# Altium PCB H05R2x.PcbDoc (part 2 of 2)
Units mil, origin at the board's own origin, x right, y up, seen from the top; angles counter-clockwise.
Board outline 2362.2 x 1363.78 mil, 4 copper layers (Top Layer, Layer 1, Layer 2, Bottom Layer); 78 components, 39 nets, 191 pads, 39 vias.
Unrouted connection lines stored in the file: 1.
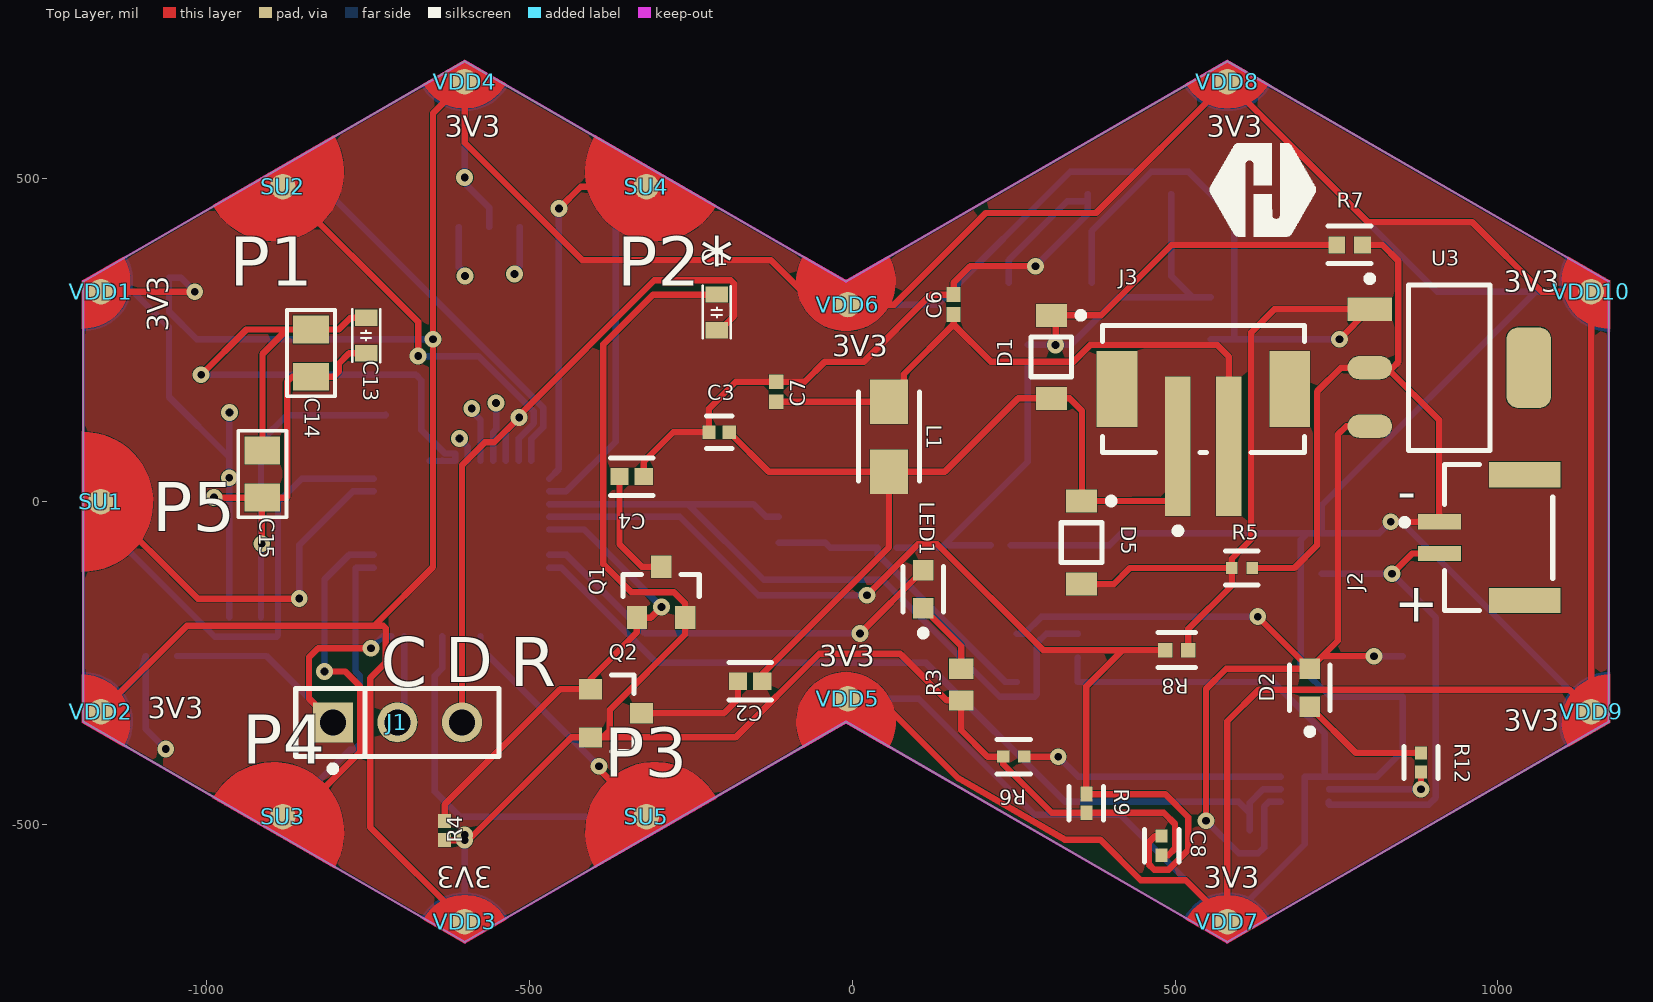
[diagram p0: Top Layer view]

## Part data (continued)
R3: library part "generic Resistor", "Res Thick Film 0603 270 Ohm 5% 0.1W(1/10W) ±200ppm/C Pad SMD Automotive T/R", Case Code (Imperial)=0603, Manufacturer=Panasonic, Manufacturer Part Number=ERJ-3GEYJ271V, Max Operating Temperature=155°C, Max Power Dissipation=100mW, Min Operating Temperature=-55°C, Temperature Coefficient=200ppm/°C, Tolerance=5%, Voltage Rating=75V, Case/Package=0603, Category="Chip SMD Resistors", ComponentLink1Description=https://datasheet.octopart.com:443/ERJ-3GEYJ271V-Panasonic-datasheet-13266872.pdf?src-supplier=RS+(Formerly+Allied+Electronics), ComponentLink1URL=https://datasheet.octopart.com:443/ERJ-3GEYJ271V-Panasonic-datasheet-13266872.pdf?src-supplier=RS+(Formerly+Allied+Electronics), ComponentLink2Description=https://datasheet.octopart.com:443/ERJ-3GEYJ271V-Panasonic-datasheet-5314550.pdf?src-supplier=Future+Electronics, ComponentLink2URL=https://datasheet.octopart.com:443/ERJ-3GEYJ271V-Panasonic-datasheet-5314550.pdf?src-supplier=Future+Electronics, ComponentLink3Description=https://datasheet.octopart.com:443/ERJ-3GEYJ271V-Panasonic-datasheet-61114972.pdf?src-supplier=Panasonic+SCT, ComponentLink3URL=https://datasheet.octopart.com:443/ERJ-3GEYJ271V-Panasonic-datasheet-61114972.pdf?src-supplier=Panasonic+SCT, ComponentLink4Description=https://datasheet.octopart.com:443/ERJ-3GEYJ271V-Panasonic-datasheet-147443676.pdf?src-supplier=Master+Electronics, ComponentLink4URL=https://datasheet.octopart.com:443/ERJ-3GEYJ271V-Panasonic-datasheet-147443676.pdf?src-supplier=Master+Electronics, ComponentLink5Description=https://datasheet.octopart.com:443/ERJ-3GEYJ271V-Panasonic-datasheet-10554283.pdf?src-supplier=element14+APAC, ComponentLink5URL=https://datasheet.octopart.com:443/ERJ-3GEYJ271V-Panasonic-datasheet-10554283.pdf?src-supplier=element14+APAC, ComponentLink6Description=https://datasheet.octopart.com:443/ERJ3GEYJ271V-Panasonic-datasheet-165581512.pdf?src-supplier=TME, ComponentLink6URL=https://datasheet.octopart.com:443/ERJ3GEYJ271V-Panasonic-datasheet-165581512.pdf?src-supplier=TME, ComponentLink7Description=https://datasheet.octopart.com:443/ERJ-3GEYJ271V-Panasonic-datasheet-164353788.pdf?src-supplier=Newark, ComponentLink7URL=https://datasheet.octopart.com:443/ERJ-3GEYJ271V-Panasonic-datasheet-164353788.pdf?src-supplier=Newark, ComponentLink8Description=https://datasheet.octopart.com:443/ERJ3GEYJ271V-Panasonic-datasheet-136608608.pdf?src-supplier=Farnell, ComponentLink8URL=https://datasheet.octopart.com:443/ERJ3GEYJ271V-Panasonic-datasheet-136608608.pdf?src-supplier=Farnell, ComponentLink9Description=https://datasheet.octopart.com:443/ERJ-3GEYJ271V-Panasonic---ECG-datasheet-15994758.pdf?src-supplier=Farnell, ComponentLink9URL=https://datasheet.octopart.com:443/ERJ-3GEYJ271V-Panasonic---ECG-datasheet-15994758.pdf?src-supplier=Farnell, ComponentLink10Description=https://datasheet.octopart.com:443/ERJ-3GEYJ271V-Panasonic-datasheet-5313456.pdf?src-supplier=Farnell, ComponentLink10URL=https://datasheet.octopart.com:443/ERJ-3GEYJ271V-Panasonic-datasheet-5313456.pdf?src-supplier=Farnell, ComponentLink11Description=https://datasheet.octopart.com/ERJ-3GEYJ271V-Panasonic-datasheet-78375410.pdf, ComponentLink11URL=https://datasheet.octopart.com/ERJ-3GEYJ271V-Panasonic-datasheet-78375410.pdf, ComponentLink12Description=https://datasheet.octopart.com/Thick-Film-Chip-Resistors-Panasonic-datasheet-family-105.pdf, ComponentLink12URL=https://datasheet.octopart.com/Thick-Film-Chip-Resistors-Panasonic-datasheet-family-105.pdf, ComponentLink13Description=https://datasheet.octopart.com:443/ERJ-3GEYJ271V-Panasonic-datasheet-7538305.pdf?src-supplier=Jameco, ComponentLink13URL=https://datasheet.octopart.com:443/ERJ-3GEYJ271V-Panasonic-datasheet-7538305.pdf?src-supplier=Jameco, ComponentLink14Description=https://datasheet.octopart.com:443/ERJ-3GEYJ271V-Panasonic-datasheet-118655.pdf?src-supplier=DigiKey, ComponentLink14URL=https://datasheet.octopart.com:443/ERJ-3GEYJ271V-Panasonic-datasheet-118655.pdf?src-supplier=DigiKey, ComponentLink15Description=https://datasheet.octopart.com:443/ERJ3GEYJ271V-Panasonic-datasheet-27908757.pdf?src-supplier=Electro+Sonic, ComponentLink15URL=https://datasheet.octopart.com:443/ERJ3GEYJ271V-Panasonic-datasheet-27908757.pdf?src-supplier=Electro+Sonic, ComponentLink16Description=https://datasheet.octopart.com:443/ERJ-3GEYJ271V-Panasonic-datasheet-37173568.pdf?src-supplier=Electro+Sonic, ComponentLink16URL=https://datasheet.octopart.com:443/ERJ-3GEYJ271V-Panasonic-datasheet-37173568.pdf?src-supplier=Electro+Sonic, Composition="Thick Film", Contact Plating=Tin, Depth=800µm, Features="Automotive AEC-Q200", Height=450µm, Lead Free="Lead Free", Length=1.6mm, Library=Hexabitz, Lifecycle Status=Production, Military Standard=Not, Mounting Technology="Surface Mount", Number of Terminals=2, Number of Terminations=2, Packaging="Cut Tape", Power Dissipation=100mW, Power Rating=100mW, Pricing="5000=0.00355, 10000=0.00348, 20000=0.00342, 30000=0.00335, 40000=0.00329 (USD)", Radiation Hardening=No, REACH SVHC=Yes, RoHS=Compliant, Schedule B="8533210045, 8533210045|8533210045|8533210045|8533210045|8533210045|8533210045|8533210045|8533210045|8533210045|8533210045|8533210045|8533210045|8533210045|8533210045|8533210045|8533210045|8533210045|8533210045|8533210045|8533210045|8533210045|8533210045|8533210045|85", Stock=45000, Supplier=Avnet, Supplier Part Number=ERJ-3GEYJ271V, Termination=SMD/SMT, Voltage Rating (DC)=75V, Width=800µm, Working Voltage=75V
R4: library part CMP-2002-04584-1, Manufacturer="KOA Speer", Part Number=SG73P1ETTP1002F
R5: library part CMP-02407-004026-1, "RES SMD 1.2K OHM 1% 1/10W 0402", Case/Package=0402, Max Operating Temperature=125°C, Max Power Dissipation=100mW, Min Operating Temperature=-55°C, Package Quantity=10000, Resistance=820R, Temperature Coefficient=50ppm/°C, Tolerance=1%, Composition="Thin Film", Contact Plating=Tin, Depth=0.5mm, Height=0.015inch, Lead Free="Lead Free", Length=0.039inch, Military Standard=Not, Number of Terminations=2, Packaging="Tape and Reel", Radiation Hardening=No, Width=0.02inch
R6: library part CMP-04015-061446-1, "3.9kΩ ±1% 0.063W, 1/16W Chip Resistor 0402 (1005 Metric) Moisture Resistant Thin Film"
R7: library part CMP-26527-000729-1, "General Purpose Thick Film Chip Resistor, 0402, 0.1Ω, 1%, 200ppm/°C, 0.125W", Case/Package=0402, Max Operating Temperature=155°C, Max Power Dissipation=125mW, Min Operating Temperature=-55°C, Package Quantity=10000, Resistance=100mR, Resistor Type="Thick Film", Temperature Coefficient=200ppm/°C, Tolerance=1%, Contact Plating=Tin, Height=0.017inch, Length=0.039inch, Mount="Surface Mount", Number of Terminations=2, Packaging="Tape and Reel", Radiation Hardening=No, RoHS Compliant=Yes, Series=CSR, Width=0.02inch
R8 R11: library part CMP-02407-002513-1, "RES Thick Film, 11kΩ, 1%, 0.063W, 100ppm/°C, 0402", Case/Package=0402, Max Operating Temperature=155°C, Max Power Dissipation=63mW, Min Operating Temperature=-55°C, Package Quantity=50000, Resistance=11kR, Temperature Coefficient=100ppm/°C, Tolerance=1%, Composition="Thick Film", Features="Automotive AEC-Q200", Height=0.016inch, Lead Free="Lead Free", Length=0.039inch, Number of Terminations=2, Packaging="Tape and Reel", Width=0.02inch
R12: library part CMP-03412-047873-1, "RES 1kΩ ±1% 0.063W 0402", RoHS Compliant=Yes
R13: library part "generic Resistor", "100mW Thick Film Resistors ±100ppm/℃ ±1% 10kΩ 0603 Chip Resistor - Surface Mount ROHS", Case Code (Imperial)=0603, Manufacturer="Yageo Group", Manufacturer Part Number=RC0603FR-0710KL, Max Operating Temperature=155°C, Min Operating Temperature=-55°C, Power Dissipation=100mW, Supplier Part Number=4023214, Temperature Coefficient=100ppm/°C, Tolerance=1%, Voltage Rating=75V, Voltage Rating (DC)=50V, Case Code (Metric)=0603, Case/Package=0603, Category="Chip SMD Resistors", China RoHS=Non-Compliant, ComponentLink1Description=https://datasheet.octopart.com:443/RC0603FR-0710KL-Yageo-datasheet-175887523.pdf?src-supplier=IHS, ComponentLink1URL=https://datasheet.octopart.com:443/RC0603FR-0710KL-Yageo-datasheet-175887523.pdf?src-supplier=IHS, ComponentLink2Description=https://datasheet.octopart.com:443/RC0603FR-0710KL-Yageo-datasheet-103092701.pdf?src-supplier=Upverter, ComponentLink2URL=https://datasheet.octopart.com:443/RC0603FR-0710KL-Yageo-datasheet-103092701.pdf?src-supplier=Upverter, ComponentLink3Description=https://datasheet.octopart.com:443/RC0603FR-0710KL-Yageo-datasheet-98239111.pdf?src-supplier=Upverter, ComponentLink3URL=https://datasheet.octopart.com:443/RC0603FR-0710KL-Yageo-datasheet-98239111.pdf?src-supplier=Upverter, ComponentLink4Description=https://datasheet.octopart.com:443/RC0603FR-0710KL-Yageo-datasheet-141265859.pdf?src-supplier=Upverter, ComponentLink4URL=https://datasheet.octopart.com:443/RC0603FR-0710KL-Yageo-datasheet-141265859.pdf?src-supplier=Upverter, ComponentLink5Description=https://sigma.octopart.com:443/138820526/technical_drawing/Yageo-RC0603FR-0710KL.pdf?src-supplier=Upverter, ComponentLink5URL=https://sigma.octopart.com:443/138820526/technical_drawing/Yageo-RC0603FR-0710KL.pdf?src-supplier=Upverter, ComponentLink6Description=https://datasheet.octopart.com:443/RC0603FR-0710KL-Yageo-datasheet-8328172.pdf?src-supplier=Farnell, ComponentLink6URL=https://datasheet.octopart.com:443/RC0603FR-0710KL-Yageo-datasheet-8328172.pdf?src-supplier=Farnell, ComponentLink7Description=https://datasheet.octopart.com:443/RC0603FR-0710KL-Yageo-datasheet-13691069.pdf?src-supplier=Farnell, ComponentLink7URL=https://datasheet.octopart.com:443/RC0603FR-0710KL-Yageo-datasheet-13691069.pdf?src-supplier=Farnell, ComponentLink8Description=https://datasheet.octopart.com:443/RC0603FR-0710KL-Yageo-datasheet-62067350.pdf?src-supplier=element14+APAC, ComponentLink8URL=https://datasheet.octopart.com:443/RC0603FR-0710KL-Yageo-datasheet-62067350.pdf?src-supplier=element14+APAC, ComponentLink9Description=https://datasheet.octopart.com:443/RC0603FR-0710KL-Yageo-datasheet-17842380.pdf?src-supplier=element14+APAC, ComponentLink9URL=https://datasheet.octopart.com:443/RC0603FR-0710KL-Yageo-datasheet-17842380.pdf?src-supplier=element14+APAC, ComponentLink10Description=https://datasheet.octopart.com:443/RC0603FR-0710KL-Yageo-datasheet-15599030.pdf?src-supplier=Future+Electronics, ComponentLink10URL=https://datasheet.octopart.com:443/RC0603FR-0710KL-Yageo-datasheet-15599030.pdf?src-supplier=Future+Electronics, ComponentLink11Description=https://datasheet.octopart.com:443/RC0603FR-0710KL-Yageo-datasheet-164759695.pdf?src-supplier=Future+Electronics, ComponentLink11URL=https://datasheet.octopart.com:443/RC0603FR-0710KL-Yageo-datasheet-164759695.pdf?src-supplier=Future+Electronics, ComponentLink12Description=https://datasheet.octopart.com:443/RC0603FR-0710KL-Yageo-datasheet-127823281.pdf?src-supplier=Future+Electronics, ComponentLink12URL=https://datasheet.octopart.com:443/RC0603FR-0710KL-Yageo-datasheet-127823281.pdf?src-supplier=Future+Electronics, ComponentLink13Description=https://datasheet.octopart.com:443/RC0603FR-0710KL-Yageo-datasheet-137700087.pdf?src-supplier=Future+Electronics, ComponentLink13URL=https://datasheet.octopart.com:443/RC0603FR-0710KL-Yageo-datasheet-137700087.pdf?src-supplier=Future+Electronics, ComponentLink14Description=https://datasheet.octopart.com:443/RC0603FR-0710KL-Yageo-datasheet-27584510.pdf?src-supplier=Future+Electronics, ComponentLink14URL=https://datasheet.octopart.com:443/RC0603FR-0710KL-Yageo-datasheet-27584510.pdf?src-supplier=Future+Electronics, ComponentLink15Description=https://datasheet.octopart.com:443/RC0603FR-0710KL-Yageo-datasheet-8324193.pdf?src-supplier=Future+Electronics, ComponentLink15URL=https://datasheet.octopart.com:443/RC0603FR-0710KL-Yageo-datasheet-8324193.pdf?src-supplier=Future+Electronics, ComponentLink16Description=https://datasheet.octopart.com:443/RC0603FR-0710KL-Yageo-datasheet-12596169.pdf?src-supplier=Newark, ComponentLink16URL=https://datasheet.octopart.com:443/RC0603FR-0710KL-Yageo-datasheet-12596169.pdf?src-supplier=Newark, ComponentLink17Description=https://datasheet.octopart.com:443/RC0603FR-0710KL-Yageo-datasheet-503470.pdf?src-supplier=Newark, ComponentLink17URL=https://datasheet.octopart.com:443/RC0603FR-0710KL-Yageo-datasheet-503470.pdf?src-supplier=Newark, ComponentLink18Description=https://datasheet.octopart.com:443/RC0603FR-0710KL-Yageo-datasheet-34211833.pdf?src-supplier=Newark, ComponentLink18URL=https://datasheet.octopart.com:443/RC0603FR-0710KL-Yageo-datasheet-34211833.pdf?src-supplier=Newark, ComponentLink19Description=https://datasheet.octopart.com:443/RC0603FR-0710KL-Yageo-datasheet-79472498.pdf?src-supplier=Megastar, ComponentLink19URL=https://datasheet.octopart.com:443/RC0603FR-0710KL-Yageo-datasheet-79472498.pdf?src-supplier=Megastar, ComponentLink20Description=https://datasheet.octopart.com/RC0603FR-0710KL-Yageo-datasheet-73766026.pdf, ComponentLink20URL=https://datasheet.octopart.com/RC0603FR-0710KL-Yageo-datasheet-73766026.pdf, ComponentLink21Description=https://datasheet.octopart.com:443/RC0603FR-0710KL-Yageo-datasheet-118562.pdf?src-supplier=DigiKey, ComponentLink21URL=https://datasheet.octopart.com:443/RC0603FR-0710KL-Yageo-datasheet-118562.pdf?src-supplier=DigiKey, ComponentLink22Description=http://sigma.octopart.com:80/rohs_statement/Yageo-company-2.pdf?src-supplier=Compliance+Statements, ComponentLink22URL=http://sigma.octopart.com:80/rohs_statement/Yageo-company-2.pdf?src-supplier=Compliance+Statements, ComponentLink23Description=http://sigma.octopart.com:80/conflict_mineral_statement/Yageo-company-3.pdf?src-supplier=Compliance+Statements, ComponentLink23URL=http://sigma.octopart.com:80/conflict_mineral_statement/Yageo-company-3.pdf?src-supplier=Compliance+Statements, Composition="Thick Film", Depth=800µm, Height=450µm, Lead Free="Lead Free", Lead Pitch=300µm, Length=1.6mm, Library=Hexabitz, Lifecycle Status=Production, Military Standard=Not, Mounting Technology="Surface Mount", Number of Terminals=2, Packaging="Tape & Reel", Pins=2, Power Rating=100mW, Pricing="5000=0.001, 25000=0.001, 150000=0.001, 500000=0.0009, 1500000=0.0009 (USD)", REACH SVHC=Yes, RoHS=Compliant, Schedule B="8533210045, 8533210045|8533210045|8533210045|8533210045|8533210045|8533210045|8533210045|8533210045|8533210045|8533210045|8533210045|8533210045|8533210045|8533210045|8533210045|8533210045|8533210045|8533210045|8533210045|8533210045|8533210045|8533210045|8533210045|85", Stock=22990000, Supplier="Future Electronics", Termination=SMD/SMT, Weight=2.012816mg, Width=800µm, Working Voltage=75V
R14: library part "generic Resistor", Library=Hexabitz
SD1 SD2 SD3 SD4 SD5: library part HEXABIT_UART_PORT_D
SU1 SU2 SU3 SU4 SU5: library part HEXABIT_UART_PORT_U
U1: library part CMP-06318-000013-1, "IC BATT CHG LI-ION 1CELL 6TDFN", Max Operating Temperature=125°C, Max Supply Voltage=6V, Min Operating Temperature=-40°C, Min Supply Voltage=3.75V, Package Quantity=3000, Lead Free="Lead Free", Mount="Surface Mount", Number of Pins=6, Packaging="Tape and Reel", Radiation Hardening=No, RoHS Compliant=Yes
U2: library part CMP-0187-00458-3, "None", Case/Package=SOT-23, Input Bias Current=1pA, Input Offset Voltage (Vos)=4.5mV, Max Operating Temperature=125°C, Max Supply Voltage=6V, Min Operating Temperature=-40°C, Min Supply Voltage=1.8V, Nominal Supply Current=100uA, Operating Supply Voltage=5.5V, Output Current=23mA, Package Quantity=3000, Power Supply Rejection Ratio (PSRR)=86dB, Voltage Gain=112dB, Amplifier Type="GENERAL PURPOSE", Bandwidth=1MHz, Common Mode Rejection Ratio=60dB, Contact Plating=Tin, Gain Bandwidth Product=1MHz, Height=1.3mm, Input Offset Voltage-Max=4.5mV, Lead Free="Lead Free", Length=3.1mm, Mount="Surface Mount", Number of Amplifiers=1, Number of Channels=1, Number of Circuits=1, Number of Elements=1, Number of Pins=5, Operating Supply Current=100uA, Output Current per Channel=23mA, Packaging="Tape and Reel", Radiation Hardening=No, REACH SVHC="No SVHC", RoHS Compliant=Yes, Slew Rate=0.6V/µs, Slew Rate-Nom=0.6V/µs, Supply Current=100uA, Technology=CMOS, Unity Gain Bandwidth Product=1MHz, Voltage=6V, Width=1.8mm
U3: library part CMP-06324-000149-1, "IC REG LINEAR 5V 300MA SOT223-3", Case/Package=SOT-223-3, Dropout Voltage=300mV, Max Input Voltage=16V, Max Operating Temperature=125°C, Max Output Current=300mA, Min Input Voltage=3.6V, Min Operating Temperature=-40°C, Min Output Voltage=3.3V, Nominal Output Voltage=5V, Nominal Supply Current=68uA, Package Quantity=1, Power Supply Rejection Ratio (PSRR)=80dB, Quiescent Current=100uA, Accuracy=2%, Height=1.7mm, Lead Free="Lead Free", Length=6.7mm, Mount="Surface Mount", Number of Outputs=1, Number of Pins=3, Number of Regulators=1, Output Current=300mA, Output Type=Fixed, Output Voltage=5V, Packaging="Tape and Reel", Polarity=Positive, Reach SVHC Compliant=Yes, RoHS Compliant=Yes, Supply Current=68uA, Width=3.7mm
U4: "MCU 32-bit ARM Cortex M0+ RISC 512KB Flash 1.8V/2.5V/3.3V 48-Pin UFQFPN EP Tray", Manufacturer=STMicroelectronics, Supplier Part Number=497-STM32G0B1CEU6-ND, Category=Microcontrollers, Library=Hexabitz, Pricing="1=4.78, 10=3.635, 25=3.3488, 100=3.0347, 260=2.87923, 520=2.7899, 1040=2.71638, 2600=2.63877 (USD)", RoHS=Yes, Stock=4305, Supplier=Digikey, Supplier 1=Digikey, Supplier Part Number 1=497-STM32G0B1CEU6-ND
VDD1 VDD2 VDD3 VDD4 VDD7 VDD8 VDD9 VDD10: library part HEXABIT_POWER_PORT_U
VDD5: library part HEXABIT_POWER_PORT_U_300L
VDD6: library part HEXABIT_POWER_PORT_U_300R
X1: "Ceramic Resonator 8MHz ±0.5% (Tol) ±0.2% (Stability) 10pF 40Ohm 3-Pin CSMD T/R", Case Code (Imperial)=1206, Case Code (Metric)=3216, Frequency=8MHz, Frequency Stability=0.2%, Frequency Tolerance=0.5%, Load Capacitance=10pF, Manufacturer=Murata, Max Operating Temperature=125°C, Min Operating Temperature=-40°C, Package Quantity=1, Case/Package=1206, Category=Capacitors, Contact Plating=Gold, Height=0.031inch, Impedance=40R, Length=3.2mm, Library=Hexabitz, Manufacturer Part Number=CSTCE8M00G52Z-R0, Mounting Technology="Surface Mount", Packaging="Tape and Reel", Pins=3, RoHS Compliant=Yes, Self Resonant Frequency=8MHz, Series=CERALOCK®, Termination=SMD/SMT, Tolerance=0.5%, Width=1.3mm

## Via types
v1: diameter 26, hole 12, Top Layer to Bottom Layer, 39 vias

## Nets (pads, with @x,y where several pads share a name; then routed paths per layer and width w, separated by ;. In a path a pad name is that pad's centre, name@x,y a point inside that pad or via, vN(x,y) a via of type N, cw(c..) or ccw(c..) an arc to the next point about the centre after c; other vN are vias at no path point)
+5: C11.1 D2.2 R11.1 U1.4 U2.5 U3.3 | length 1642.4
  Top Layer w10: v1(548,-494) 548,-290 579.4,-258.6 D2.2 ; v1(628.22,-178) D2.2 ; U3.3 765,116.88 752,103.88 752,-215.42 728.16,-239.26 ; v1(808,-239.26) 728.16,-239.26 ; D2.2 728.16,-239.26
  Bottom Layer w10: U2.5 266.76,-204.42 293.17,-178 v1(628.22,-178) ; v1(548,-494) 598.63,-544.63 R11.1 629,-544.63 638,-535.63 638,-471.99 645,-464.99 U1.4 ; v1(808,-239.26) C11.1
CLK_BOOT: J1.1 R13.1 U4.36 | length 540.5
  Top Layer w10: J1.1 -841,-304.82 -841,-241 -827,-227 v1(-745,-227)
  Bottom Layer w10: R13.1 -906.85,-238.97 J1.1 ; v1(-745,-227) -726.42,-208.43 U4.36
DATA: J1.2 U4.35 | length 143.8
  Bottom Layer w10: J1.2 -693.55,-341.74 U4.35
GND: C1.1 C5.2 C8.2 C10.2 C11.2 D6.1 GND1.Pwr_D GND2.Pwr_D GND3.Pwr_D GND4.Pwr_D GND5.Pwr_D GND6.Pwr_D GND7.Pwr_D GND8.Pwr_D GND9.Pwr_D GND10.Pwr_D J2.1 Q1.2 Q2.2 R3.1 R4.1 R5.2 R6.2 R7.2 R9.2 R13.2 R14.1 U1.1 U1.7 U2.2 U2.3 U3.2 U4.49 X1.P$2 | length 13352.8
  Top Layer w10: R4.1 v1(-600,-524.25) -594.25,-524.25 -435.07,-365.07 Q2.2 -386.07,-365.07 ; C1.1 -308,320.64 -385,243.64 -385,-97 -342,-140 -276,-140 -258.35,-157.65 Q1.2 -258.35,-205.36 -375,-322 -375,-354 -386.07,-365.07 ; C8.2 489.43,-547.57 500,-537 500,-499 482.57,-481.58 R9.2 309,-481.58 233.85,-406.43 R6.2 209.81,-394.87 168.94,-354 R3.1 146.77,-307.77 77.31,-238.31 74.38,-235.38 -50.87,-235.38 -180.56,-365.07 -386.07,-365.07 ; R5.2 685,-102.68 720,-67.68 720,170.43 757,207.43 U3.2 U3.2@828,207.43 ; R7.2 821,397.69 846,372.69 846,216.43 837,207.43 U3.2@828,207.43 ; v1(834,-31) J2.1@909,-31.04 ; J2.1 J2.1@909,-31.04 ; U3.2@828,207.43 909,126.43 J2.1@909,-31.04
  Layer 1 w10: v1(-964.56,37) -878.56,-49 816,-49 v1(834,-31) ; v1(-964,138) v1(-600,502)
  Layer 2 w10: v1(-1062.96,-383) -733,-383 ; v1@-964.56,41 v1(-964.56,37) -964.56,-74.45 -762,-277 -762,-354 -733,-383 ; v1(-600,-516) -733,-383
  Bottom Layer w10: GND1.Pwr_D -1101.03,-262.97 R13.2 -1093.96,-352 v1(-1062.96,-383) ; GND2.Pwr_D -1112.97,325.2 -1057.77,270 D6.1 -1057.77,162 -964.56,68.78 ; R14.1 -964.56,68.78 ; v1(-964,138) -964.56,137.44 -964.56,68.78 ; GND3.Pwr_D v1(-600,-524.25) v1(-600,-516) ; GND4.Pwr_D v1(-600,502) -596.94,498.93 -596.94,490.21 -561.6,454.87 X1.P$2 ; GND5.Pwr_D 103.2,-305.2 283,-485 415.71,-485 GND7.Pwr_D 701.06,-530.43 U1.7 701.06,-425.62 U1.1@732,-425.62 ; GND6.Pwr_D 132.2,305.2 338,511 441.71,511 GND8.Pwr_D 906.29,325.2 1058.2,325.2 ; C5.2 398.75,-67.25 417.36,-48.65 705.36,-48.65 ; U2.2 349,-241.82 349,-279.22 U2.3 652.21,-279.22 732,-359 U1.1@732,-425.62 ; GND9.Pwr_D 850.29,-31 v1(834,-31) 816,-49 727.69,-49 C10.2 ; GND10.Pwr_D 1058.2,325.2 ; 705.36,-48.65 695,-59 695,-257 740.29,-302.29 C11.2 852.59,-386 812.97,-425.62 U1.1 U1.1@732,-425.62 ; 705.36,-48.65 C10.2 ; C10.2 727.33,-5.67 1058.2,325.2
  other v1: 834,-31 834,-31 -964.56,37
ISNS: C9.2 D1.1 D3.1 R7.1 R10.2 | length 1020.6
  Top Layer w10: D1.1 D1.1@315,288.56 ; v1(315,242.67) D1.1@315,288.56 ; R7.1 495.14,397.69 386,288.56 D1.1@315,288.56
  Bottom Layer w10: R10.2 v1(315,242.67) 338.68,242.67 412.71,316.71 527.23,316.71 ; D3.1 493.94,350 527.23,316.71 ; C9.2 527.23,316.71
NetC2_1: C2.1 C3.2 D1.2 D5.1 J3.1 L1.2 | length 1405.9
  Top Layer w10: C3.2 -129.34,46.58 L1.2 ; C2.1 -139.14,-267 57.07,-70.8 L1.2 ; D5.1 D5.1@356,1.04 ; J3.1 504.54,1 504.49,1 432.96,1.04 D5.1@356,1.04 ; L1.2 143.76,46.58 257,159.82 D1.2 337.18,159.82 356,141 D5.1@356,1.04
NetC2_2: C2.2 Q2.3 | length 186.3
  Top Layer w10: Q2.3 -198.49,-327.67 -176.82,-306 C2.2
NetC3_1: C3.1 C4.1 C6.2 C7.2 D3.2 D4.1 | length 1128.3
  Top Layer w10: C4.1 -322.51,62 -277.08,107.42 C3.1 -221.67,143.91 -180,185.58 C7.2 -73.44,185.58 -42.67,216.35 17.7,216.35 122,320.65 C6.2 157.16,339.16 182.66,364.66 v1(283.86,364.66)
  Bottom Layer w10: D4.1 242.35,374.14 333.2,465 D3.2@365.2,465 ; v1(283.86,364.66) 365.2,446 D3.2@365.2,465 ; D3.2 D3.2@365.2,465
NetC4_2: C4.2 Q1.3 | length 183.6
  Top Layer w10: C4.2 -360.19,-66 -325.43,-100.76 Q1.3
NetC5_1: C5.1 R2.2 R10.1 | length 482.2
  Bottom Layer w10: R2.2 138.89,-71.18 142.81,-67.25 ; C5.1 142.81,-67.25 ; R10.1 272.06,62 142.81,-67.25
NetC6_1: C6.1 C7.1 J3.2 L1.1 | length 958.4
  Top Layer w10: C7.1 -66,154.87 -65.87,155 L1.1@57.07,155 ; L1.1 L1.1@57.07,155 ; C6.1 157.16,274.41 ; J3.2 583.29,224.71 565,243 369,243 343,217 214.57,217 157.16,274.41 ; L1.1@57.07,155 79.93,177.86 79.93,197.17 157.16,274.41
NetC8_1: C8.1 R8.2 R9.1 U4.16 | length 1710.9
  Top Layer w10: v1(23,-145) 102,-66 132,-66 295.8,-229.8 419,-229.8 ; C8.1 469,-517.76 459,-527.76 459,-561 468,-570 490,-570 520.65,-539.35 520.65,-488.45 485,-452.8 R9.1 362.7,-286.1 419,-229.8 ; R8.2 419,-229.8
  Bottom Layer w10: U4.16 -267,-23.39 -145.38,-145 v1(23,-145)
NetC10_1: C10.1 J2.2 U1.3 | length 744.3
  Top Layer w10: v1(836.16,-111.69) 867.59,-80.26 J2.2
  Bottom Layer w10: C10.1 v1(836.16,-111.69) 904,-179.52 904,-458 893,-469 739,-469 738,-468 738,-464.99 U1.3
NetD2_1: D2.1 R12.1 | length 201.7
  Top Layer w10: D2.1 780.18,-389.03 R12.1
NetLED1_1: LED1.1 R3.2 | length 117.9
  Top Layer w10: LED1.1 168.94,-223.84 R3.2
NetLED1_2: LED1.2 U4.19 | length 670.2
  Top Layer w10: v1(12.16,-204) LED1.2
  Bottom Layer w10: U4.19 -442.18,-82.44 -320.61,-204 v1(12.16,-204)
NetQ1_1: Q1.1 Q2.1 R4.2 U4.17 | length 735.1
  Top Layer w10: R4.2 -631,-469 -452.27,-290.27 Q2.1 -404.92,-274 -333.16,-202.24 Q1.1 -311.5,-179.5 v1(-295,-163)
  Bottom Layer w10: U4.17 -414.93,-43.07 v1(-295,-163)
NetR1_1: R1.1 U2.1 U4.15 | length 1178.4
  Bottom Layer w10: U4.15 -254.3,-3.7 ; R1.1 -133,-23.68 -152.97,-3.7 -254.3,-3.7 ; U2.1 300.59,-204.42 286,-219 286,-298.52 282.51,-302 228.49,-302 47.49,-121 -137,-121 -254.3,-3.7
NetR1_2: R1.2 R2.1 U2.4 | length 464.7
  Bottom Layer w10: R1.2 -41.68,-63.33 -33.83,-71.18 R2.1 40.06,-81.87 237.41,-279.22 U2.4
NetR6_1: R6.1 U1.6 | length 409.9
  Top Layer w10: R6.1 v1(319.32,-394.87)
  Bottom Layer w10: v1(319.32,-394.87) 350.07,-425.62 U1.6
NetR11_2: R11.2 U1.5 U4.20 | length 1341.7
  Bottom Layer w10: U4.20 -450,-102.13 -302.37,-249.76 114.58,-249.76 329.83,-465 598.65,-465 615.65,-482 ; R11.2 615.65,-482 ; U1.5 636.35,-445.31 615.65,-466 615.65,-482
NetR12_2: R12.2 U1.2 | length 168.9
  Top Layer w10: v1(880.91,-445.31) R12.2
  Bottom Layer w10: U1.2 v1(880.91,-445.31)
NetU4_8: U4.8 X1.P$3 | length 376
  Layer 2 w10: v1(-599.44,349.62) -599.44,159.4 -588.82,148.78 v1(-588.82,144.45)
  Bottom Layer w10: X1.P$3 -608.84,363.34 -599.44,353.95 v1(-599.44,349.62) ; v1(-588.82,144.45) -588.82,140.12 -575.44,126.74 U4.8
NetU4_9: U4.9 X1.P$1 | length 380.2
  Layer 2 w10: v1(-551.36,152.83) -552.48,153.95 -552.48,216.92 -522.85,246.55 v1(-522.85,352.41)
  Bottom Layer w10: U4.9 -555.75,107.55 -551.36,111.94 v1(-551.36,152.83) ; v1(-522.85,352.41) -522.85,356.74 -514.36,365.24 X1.P$1
NRST: C1.2 J1.3 U4.10 | length 1103.9
  Top Layer w10: J1.3 -604.08,56.38 -568.57,91.89 -554.16,91.89 v1(-515.59,130.47) -515.59,133.56 -306.41,342.74 -188.06,342.74 -182.5,337.17 -182.5,287.62 -204.6,265.52 C1.2
  Bottom Layer w10: U4.10 -536.07,109.99 v1(-515.59,130.47)
UART1_RX: SD5.UART_D U4.32 | length 588.9
  Bottom Layer w10: U4.32 -634.49,-258 -646,-269.51 -646,-449 -607.2,-487.8 SD5.UART_D
UART1_TX: SU5.UART_U U4.29 | length 385.8
  Top Layer w10: v1(-391.8,-409.65) -391.8,-414.5 SU5.UART_U
  Bottom Layer w10: U4.29 -575.44,-226 v1(-391.8,-409.65)
UART2_RX: SD4.UART_D U4.14 | length 549.5
  Bottom Layer w10: U4.14 -443,15.98 -366,92.98 -366,440.3 SD4.UART_D
UART2_TX: SU4.UART_U U4.13 | length 574.2
  Top Layer w10: v1(-454,454) -420.2,487.8 SU4.UART_U
  Bottom Layer w10: U4.13 -469,35.67 -454,50.67 v1(-454,454)
UART3_RX: SD1.UART_D U4.48 | length 750.3
  Bottom Layer w10: SD1.UART_D -1163.39,-32.61 -987,-209 -891,-209 -889,-207 -889,-1 -852.33,35.67 U4.48
UART3_TX: SU1.UART_U U4.47 | length 602.1
  Top Layer w10: SU1.UART_U -1013.39,-150 v1(-856,-150)
  Bottom Layer w10: v1(-856,-150) -856,-67 -773.01,15.98 U4.47
UART4_RX: SD2.UART_D U4.12 | length 634.6
  Bottom Layer w10: SD2.UART_D -820.59,487.8 -478.59,145.8 -478.59,115.15 -496.7,97.03 U4.12
UART4_TX: SU2.UART_U U4.11 | length 649.7
  Top Layer w10: SU2.UART_U -672,278.3 v1(-672,225.5)
  Bottom Layer w10: v1(-672,225.5) -578.79,225.5 -493.09,139.79 -493.09,121.15 -516.38,97.86 U4.11
UART5_RX: SD3.UART_D U4.41 | length 469.6
  Bottom Layer w10: SD3.UART_D -777.7,-384 -771,-384 -762,-375 -762,-270 -769,-263 -769,-103.13 -768,-102.13 U4.41
UART5_TX: SU3.UART_U U4.42 | length 561.9
  Top Layer w10: SU3.UART_U -861.8,-487.8 -762,-388 -762,-286 -785,-263 v1(-817,-263)
  Bottom Layer w10: v1(-817,-263) -817,-120.44 -779,-82.44 U4.42
VDD: D6.2 FB1.1 VDD1.Pwr_U VDD2.Pwr_U VDD3.Pwr_U VDD4.Pwr_U VDD5.Pwr_U VDD6.Pwr_U VDD7.Pwr_U VDD8.Pwr_U VDD9.Pwr_U VDD10.Pwr_U | length 7092.2
  Top Layer w10: VDD2.Pwr_U -1030.06,-192 -740,-192 ; VDD1.Pwr_U v1(-1018,325.2) ; VDD3.Pwr_U -746,-504.39 -746,-273.1 -722,-249.1 -722,-196.06 -726.05,-192 -740,-192 ; VDD5.Pwr_U 41.2,-305.2 162.67,-426.68 163.6,-427.61 329.12,-523.17 384.16,-523.17 447,-586 516.71,-586 VDD7.Pwr_U 581.1,-339.9 630,-291 1110.29,-291 VDD9.Pwr_U VDD10.Pwr_U 1067.8,325.2 960,433 798.49,433 VDD8.Pwr_U 377.71,447 207,447 65.2,305.2 VDD6.Pwr_U -57.2,305.2 -126.09,374.08 -418.09,374.08 -600,556 VDD4.Pwr_U -649,601.39 v1(-649,251.6) -649,-101 -740,-192
  Bottom Layer w10: v1(-1018,325.2) -1039.76,346.96 -1057.77,346.96 D6.2 -1057.77,294.37 -1015,251.6 FB1.1 v1(-649,251.6)
VDDA: C12.2 C13.2 C14.1 C15.2 FB1.2 U4.4 U4.5 U4.6 | length 1035.4
  Top Layer w10: v1(-1008,196.48) -937.89,266.59 -875,266.59 ; C15.2 -913,79.3 -913,228.59 -875,266.59 ; C13.2 -776.72,284.87 -795,266.59 C14.1 -875,266.59
  Bottom Layer w10: v1(-1008,196.48) FB1.2 -675.46,196.48 -666.98,188 C12.2 -666.98,111 -630.55,74.57 -614.81,74.57 U4.6 -614.81,63 U4.5@-634.49,63 ; U4.4 -654.18,63 U4.5@-634.49,63 ; U4.5 U4.5@-634.49,63
VREC: C9.1 D4.2 D5.2 R5.1 R8.1 U3.1 | length 1795.1
  Top Layer w10: D5.2 405,-127.7 430.02,-102.68 R5.1 ; R8.1 520.69,-197.11 587.8,-130 R5.1 ; v1(754.59,251.57) U3.1@801,297.99 ; U3.1 U3.1@801,297.99 ; R5.1 587.8,-88.2 618,-58 618,262 653.99,297.99 U3.1@801,297.99
  Bottom Layer w10: D4.2 371.09,419.08 463,511 521,511 592,440 592,251.57 ; C9.1 592,251.57 ; v1(754.59,251.57) 592,251.57
VSSA: C12.1 C13.1 C14.2 C15.1 R14.2 U4.7 | length 1487.3
  Top Layer w10: v1(-988,6.3) C15.1@-914,6.3 ; v1(-914,-65) C15.1@-914,6.3 ; C13.1 -779,229.75 -795,213.75 -795,201.59 -803,193.59 C14.2 -867,193.59 -875,185.59 -875,7.3 -876,6.3 C15.1 C15.1@-914,6.3
  Layer 1 w10: v1(-988,6.3) -988,62 -952,98 v1(-608,98)
  Bottom Layer w10: R14.2 v1@-915.34,-66.35 ; v1(-914,-65) v1@-915.34,-66.35 ; C12.1 -722.1,134 -875.34,134 -915.34,94 v1@-915.34,-66.35 ; v1(-608,98) -595.12,85.12 U4.7
pads on no net: J2.3 J2.4 J3.3 J3.4 U3.4 U4.1 U4.2 U4.3 U4.18 U4.21 U4.22 U4.23 U4.24 U4.25 U4.26 U4.27 U4.28 U4.30 U4.31 U4.33 U4.34 U4.37 U4.38 U4.39 U4.40 U4.43 U4.44 U4.45 U4.46

## Polygon pours and split planes (outlines as drawn)
no net on Top Layer "NONET_L01_P002" (solid, pour order 2): -1190.55,-340.94 -600,-681.89 -9.45,-340.94 581.1,-681.89 1171.65,-340.94 1171.65,340.94 581.1,681.89 -9.45,340.94 -600,681.89 -1190.55,340.94
no net on Bottom Layer "NONET_L04_P003" (solid, pour order 3): -600,681.89 -1190.6,340.99 -1190.55,340.94 -1190.55,-340.94 -600,-681.89 -9.45,-340.94 581.1,-681.89 1171.65,-340.94 1171.65,340.94 581.1,681.89 -9.45,340.94
no net on Layer 1 "NONET_L02_P004" (solid, pour order 4): -600,681.89 -1190.55,340.94 -1190.55,-340.94 -600,-681.89 -9.45,-340.94 581.1,-681.89 1171.65,-340.94 1171.65,340.94 581.1,681.89 -9.45,340.94
no net on Layer 2 "NONET_L03_P005" (solid, pour order 5): -600,681.89 -1190.6,340.99 -1192.71,-342.21 -600,-681.89 -7.25,-342.21 -9.45,-340.94 581.05,-684.06 1171.65,-340.94 1171.65,335.87 581.1,681.89 581.05,681.94 -7.25,338.74

## Keep-outs
Keep-Out Layer:
  the board outline again, w3.94

## Silkscreen, mask and mechanical layers (free items; w line width, h text height)
Top Overlay:
  drawing of 1337 lines, arcs and shapes, not listed
  text "3V3" at -631,565.01 h32
  text "3V3" at 549,565.01 h32
  text "P1" at -964,334.02 h76
  text "P2*" at -364,334.02 h76
  text "3V3" at 1009,325.01 h32
  text "3V3" at -1059.01,263 h32 r90
  text "3V3" at -31,225.01 h32
  text "-" at 844.48,-13.54 h60
  text "P5" at -1084,-45.98 h76
  text "+" at 839.24,-185.59 h60
  text "3V3" at -51,-254.99 h32
  text "D" at -630,-279.99 h70
  text "C" at -730,-285.98 h76
  text "R" at -530,-285.98 h76
  text "3V3" at -1091,-334.99 h32
  text "3V3" at 1009,-354.99 h32
  text "P4" at -944,-405.98 h76
  text "P3" at -384,-425.98 h76
  text "3V3" at -557,-565.01 h32 r180
  text "3V3" at 544.22,-597.67 h32
Bottom Overlay:
  text "GND" at -631,594.99 h32 r180
  text "GND" at 549,594.99 h32 r180
  text "P1" at -710,414.02 h76
  text "P2*" at -224,334.02 h76
  text "GND" at 1083,325.01 h32
  text "GND" at -1105.01,277 h32 r90
  text "GND" at -51,254.99 h32 r180
  text "H05R2x" at 1103.16,210.24 h60 r270
  text "P5" at -984,-45.98 h76
  text "GND" at -51,-225.01 h32 r180
  text "GND" at -997,-334.99 h32
  text "GND" at 1083,-354.99 h32
  text "P4" at -824,-405.98 h76
  text "P3" at -424,-505.98 h76
  text "GND" at -651,-565.01 h32 r180
  text "GND" at 533.34,-564.64 h32 r180
Top Solder:
  drawing of 17 lines, arcs and shapes, not listed
Bottom Solder:
  drawing of 17 lines, arcs and shapes, not listed
Dimensions:
  lines w3.94: -3.05,-340.94 -593.6,-681.89 -1184.15,-340.94 -1184.15,340.94 -593.6,681.89 -3.05,340.94

## Text inside footprints (layer, text, board x,y; h text height)
C14: Mechanical 32 "1" at -837.88,276.58 h25 r270; Mechanical 32 "2" at -837.88,203.58 h25 r270; Mechanical 33 "C40" at -845.05,156.58 h25 r270
C15: Mechanical 32 "1" at -913.1,-3.7 h25 r90; Mechanical 32 "2" at -913.1,69.3 h25 r90; Mechanical 33 "C40" at -905.93,116.3 h25 r90